# EAGLE board LilyPad_USB_Plus_Standalone-Panel-v10 (EAGLE 7.7.0), part 1 of 4
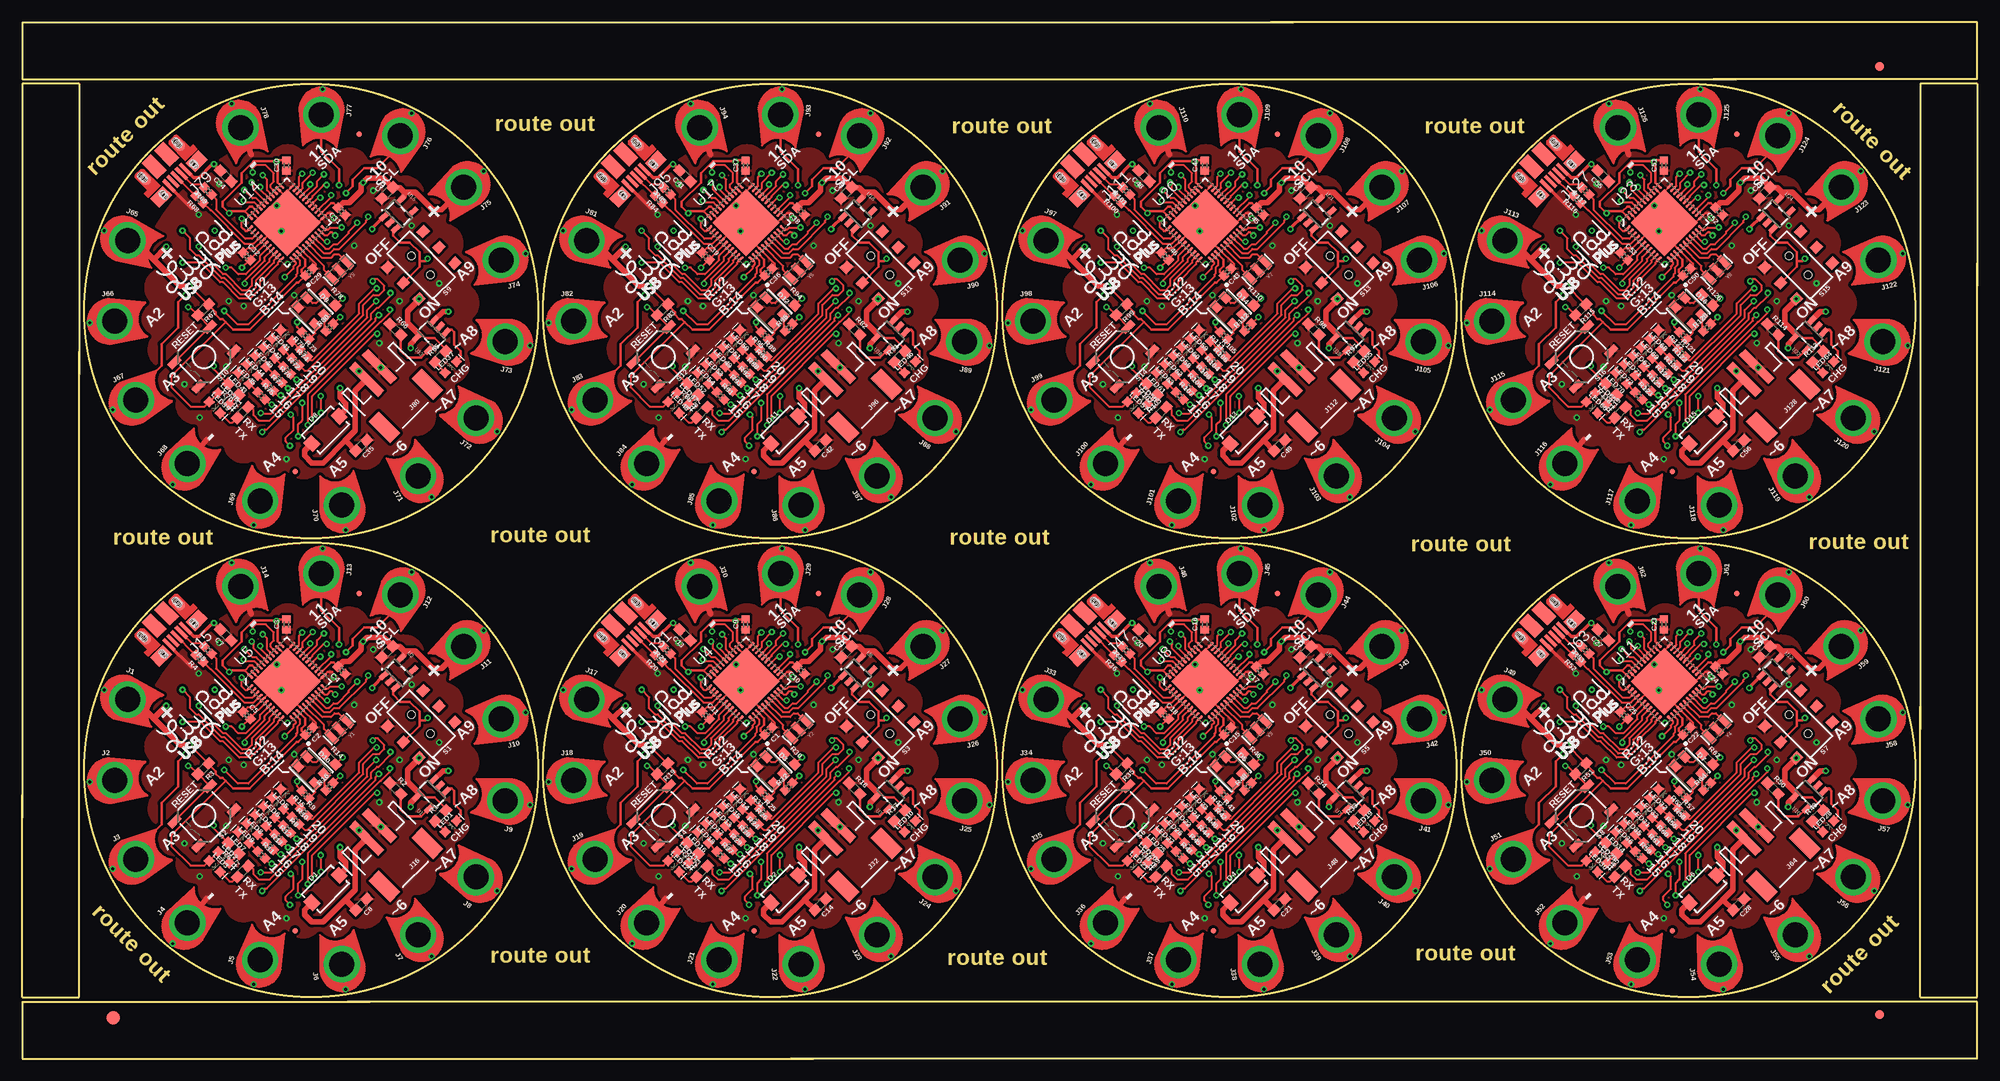
[diagram p0: board, top side]
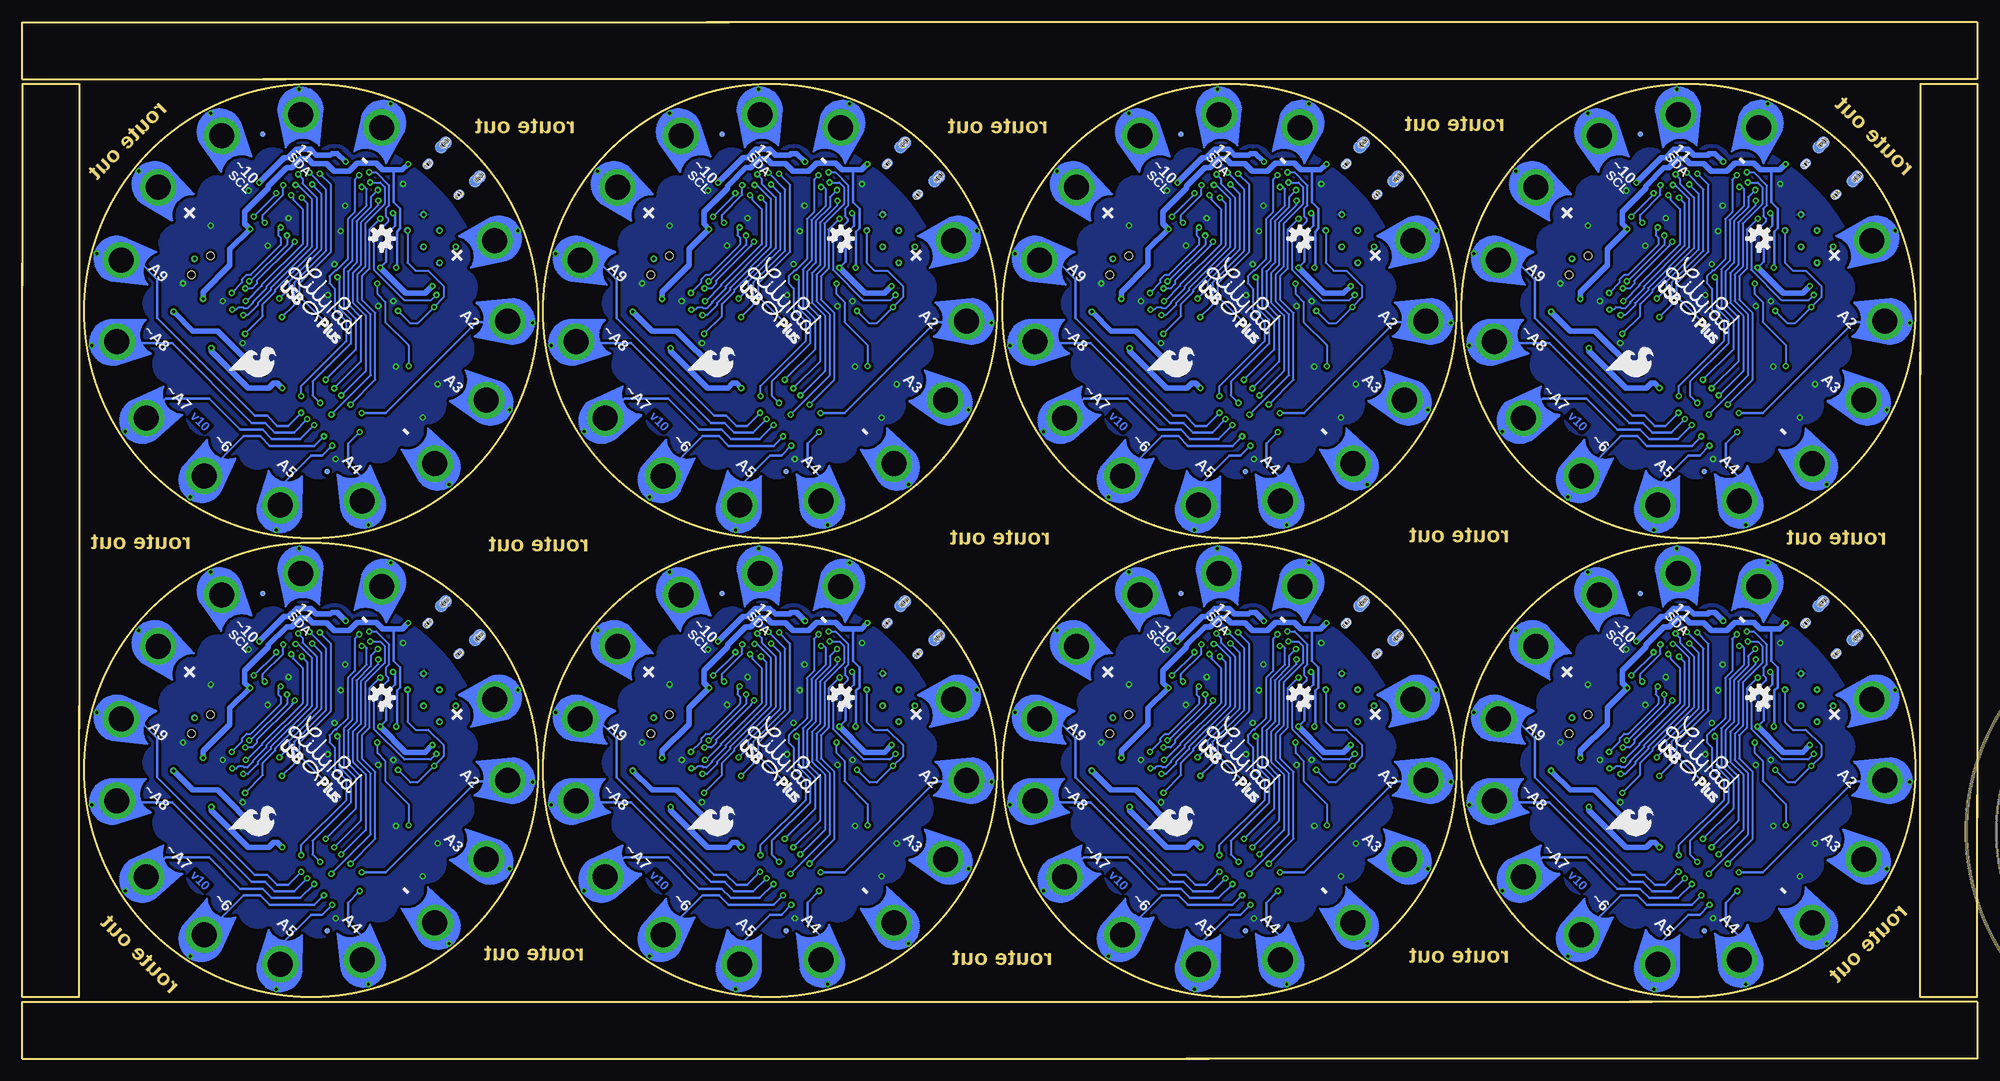
[diagram p1: board, bottom side, seen from below]

Size 218.44 x 115.82 mm. Coordinates in mm from the lower left corner, seen from the top.
Outline: 6.35,78.99 6.35,6.86 0,6.86 0,29.46
Outline: 0,26.92 0,108.97 6.35,108.97 6.35,76.45
Outline: 88.39,0 0,0 0,6.35 38.86,6.35
Outline: 36.32,6.35 218.44,6.35 218.44,0 85.85,0
Outline: 139.45,115.82 218.44,115.82 218.44,109.47 188.98,109.47
Outline: 191.52,109.47 0,109.47 0,115.82 141.99,115.82
Outline: 212.09,36.83 212.09,108.97 218.44,108.97 218.44,86.36
Outline: 218.44,88.9 218.44,6.86 212.09,6.86 212.09,39.37
Outline: circle at 32.26,32.26 radius 25.37
Outline: circle at 83.57,32.26 radius 25.37
Outline: circle at 134.87,32.26 radius 25.37
Outline: circle at 186.18,32.26 radius 25.37
Outline: circle at 32.26,83.57 radius 25.37
Outline: circle at 83.57,83.57 radius 25.37
Outline: circle at 134.87,83.57 radius 25.37
Outline: circle at 186.18,83.57 radius 25.37
Copper layers (1*16): Top 0.035mm / dielectric 1.5mm / Bottom 0.035mm
Design rules "SparkFun-2-layer-TIGHT *": minimum track width 7mil, minimum drill 15mil, track to track 8mil, track to pad 8mil, pad to pad 8mil, via to via 8mil, smd to smd 8mil, copper to edge 7mil, drill to drill 7mil, minimum pad ring 7mil, minimum via ring 7mil, stop-mask expansion 4mil, vias tented up to drill 25mil, thermal gap 10mil
tRestrict: area 10.3,41.9 to 22.6,54.3; area 61.6,41.9 to 73.9,54.3; area 112.9,41.9 to 125.2,54.3; area 164.2,41.9 to 176.5,54.3; area 10.3,93.2 to 22.6,105.6; area 61.6,93.2 to 73.9,105.6; area 112.9,93.2 to 125.2,105.6; area 164.2,93.2 to 176.5,105.6; 8 lines
bRestrict: area 10.3,41.9 to 22.6,54.3; area 61.6,41.9 to 73.9,54.3; area 112.9,41.9 to 125.2,54.3; area 164.2,41.9 to 176.5,54.3; area 10.3,93.2 to 22.6,105.6; area 61.6,93.2 to 73.9,105.6; area 112.9,93.2 to 125.2,105.6; area 164.2,93.2 to 176.5,105.6; 8 lines

## Footprints (pad centres in the part's own frame; a part is rotated, then mirrored left to right if it is on the bottom)
0402 = smd 0.85 x 0.9: 1 -0.58,0; 2 0.58,0
0603 = smd 1.1 x 1: 1 -0.85,0; 2 0.85,0
SMA-DIODE = smd 1.27 x 1.47: A -2.15,0; C 2.15,0
PLCC4SMDLED = smd 1.2 x 0.9: 1 -1.4,0.725; 2 1.4,0.725; 3 1.4,-0.725; 4 -1.4,-0.725
FIDUCIAL-1.5X3 = smd 1.5 x 1.5: 1 0,0
FIDUCIAL-1X2 = smd 1 x 1: 1 0,0
PETAL-LONG-1-2SIDE = drill 2.794 pad 4.064: 1 0.03,0
USB-MICROB-PTH = smd 0.4 x 1.75: D+ 0.031,1.331; D- -0.619,1.331; GND 1.331,1.331; ID 0.681,1.331; VBUS -1.269,1.331 | smd 1.4 x 2.1 bottom: P$1 2.701,-1.142; P$3 -2.659,-1.144 | smd 1 x 1.3: P$2 2.487,1.594; P$6 -2.368,1.604 | smd 1 x 1.3 bottom: P$4 -2.368,1.604; P$10 2.481,1.598 | smd 1.1 x 1.5: P$8 2.701,-1.142; P$12 -2.659,-1.144 | smd 2 x 1.46: SHEILD2 2.831,1.606; SHIELD -2.794,1.606 | smd 1.425 x 2.5: SHIELD3 -0.979,-1.349; SHIELD4 0.996,-1.352 | hole 0.7: -2.693,-1.134; -2.693,-1.3; -2.694,-1.499; -2.694,-1.664; 2.768,-1.134; 2.767,-1.303; 2.766,-1.496; 2.766,-1.664 | hole 0.66: -2.359,1.821; -2.349,1.691; -2.359,1.541; -2.354,1.432; 2.481,1.821; 2.491,1.691; 2.481,1.541; 2.486,1.432
JST-2-SMD = smd 1 x 4.6: 1 -1,-3.7; 2 1,-3.7 | smd 1.6 x 3.4: NC1 -3.4,1.5; NC2 3.4,1.5
MICRO-FIDUCIAL = smd 0.635 x 0.635: 1 0,0
LED-0603 = smd 1 x 1: A -0.877,0; C 0.877,0
SWITCH_DPDT_SMD_AYZ0202 = smd 1 x 1.15: 1 -2.5,2.825; 2 0,2.825; 3 2.5,2.825; 4 -2.5,-2.825; 5 0,-2.825; 6 2.5,-2.825 | hole 0.85: 1.5,0; -1.5,0
TACTILE_SWITCH_SMD_5.2MM = smd 1.524 x 0.762: 1 -2.794,1.905; 2 2.794,1.905; 3 -2.794,-1.905; 4 2.794,-1.905
PAD.03X.03 = smd 0.762 x 0.762: P$1 0,0
SOT23-5 = smd 0.55 x 1.2: 1 -0.95,-1.3; 2 0,-1.3; 3 0.95,-1.3; 4 0.95,1.3; 5 -0.95,1.3
QFN-44-PAD_1:1-LESS_PASTE = smd 0.8 x 0.3: 1 -3.337,2.458; 2 -3.337,1.958; 3 -3.337,1.479; 4 -3.337,0.979; 5 -3.337,0.5; 6 -3.337,0; 7 -3.337,-0.5; 8 -3.337,-0.979; 9 -3.337,-1.479; 10 -3.337,-1.958; 11 -3.337,-2.458; 23 3.337,-2.458; 24 3.337,-1.958; 25 3.337,-1.479; 26 3.337,-0.979; 27 3.337,-0.5; 28 3.337,0; 29 3.337,0.5; 30 3.337,0.979; 31 3.337,1.479; 32 3.337,1.958; 33 3.337,2.458 | smd 0.3 x 0.8: 12 -2.458,-3.337; 13 -1.958,-3.337; 14 -1.479,-3.337; 15 -0.979,-3.337; 16 -0.5,-3.337; 17 0,-3.337; 18 0.5,-3.337; 19 0.979,-3.337; 20 1.479,-3.337; 21 1.958,-3.337; 22 2.458,-3.337; 34 2.458,3.337; 35 1.958,3.337; 36 1.479,3.337; 37 0.979,3.337; 38 0.5,3.337; 39 0,3.337; 40 -0.5,3.337; 41 -0.979,3.337; 42 -1.479,3.337; 43 -1.958,3.337; 44 -2.458,3.337 | smd 5.3 x 5.3: EPAD 0,0
RESONATOR-SMD = smd 0.7 x 1.7: 1 -1.2,0; 2 0,0; 3 1.2,0

## Placement (x,y rotation side)
C1  0.1uF  [0402]  83.35,36.6 225 top
C2  0.1uF  [0402]  32.04,36.6 225 top
C3  0.1uF  [0402]  29.51,48.52 90 top
C4  0.1uF  [0402]  35.67,43.39 135 top
C5  1.0uF  [0402]  25.07,38.36 315 top
C6  4.7uF  [0603]  40.79,45.46 45 top
C7  4.7uF  [0603]  22.74,47.34 135 top
C8  4.7uF  [0603]  37.87,17.22 225 top
C9  0.1uF  [0402]  80.82,48.52 90 top
C10  0.1uF  [0402]  86.98,43.39 135 top
C11  1.0uF  [0402]  76.38,38.36 315 top
C12  4.7uF  [0603]  92.1,45.46 45 top
C13  4.7uF  [0603]  74.05,47.34 135 top
C14  4.7uF  [0603]  89.18,17.22 225 top
C15  0.1uF  [0402]  134.66,36.6 225 top
C16  0.1uF  [0402]  132.12,48.52 90 top
C17  0.1uF  [0402]  138.29,43.39 135 top
C18  1.0uF  [0402]  127.69,38.36 315 top
C19  4.7uF  [0603]  143.41,45.46 45 top
C20  4.7uF  [0603]  125.35,47.34 135 top
C21  4.7uF  [0603]  140.49,17.22 225 top
C22  0.1uF  [0402]  185.97,36.6 225 top
C23  0.1uF  [0402]  183.43,48.52 90 top
C24  0.1uF  [0402]  189.59,43.39 135 top
C25  1.0uF  [0402]  179,38.36 315 top
C26  4.7uF  [0603]  194.71,45.46 45 top
C27  4.7uF  [0603]  176.66,47.34 135 top
C28  4.7uF  [0603]  191.79,17.22 225 top
C29  0.1uF  [0402]  32.04,87.91 225 top
C30  0.1uF  [0402]  29.51,99.83 90 top
C31  0.1uF  [0402]  35.67,94.7 135 top
C32  1.0uF  [0402]  25.07,89.67 315 top
C33  4.7uF  [0603]  40.79,96.77 45 top
C34  4.7uF  [0603]  22.74,98.65 135 top
C35  4.7uF  [0603]  37.87,68.52 225 top
C36  0.1uF  [0402]  83.35,87.91 225 top
C37  0.1uF  [0402]  80.82,99.83 90 top
C38  0.1uF  [0402]  86.98,94.7 135 top
C39  1.0uF  [0402]  76.38,89.67 315 top
C40  4.7uF  [0603]  92.1,96.77 45 top
C41  4.7uF  [0603]  74.05,98.65 135 top
C42  4.7uF  [0603]  89.18,68.52 225 top
C43  0.1uF  [0402]  134.66,87.91 225 top
C44  0.1uF  [0402]  132.12,99.83 90 top
C45  0.1uF  [0402]  138.29,94.7 135 top
C46  1.0uF  [0402]  127.69,89.67 315 top
C47  4.7uF  [0603]  143.41,96.77 45 top
C48  4.7uF  [0603]  125.35,98.65 135 top
C49  4.7uF  [0603]  140.49,68.52 225 top
C50  0.1uF  [0402]  185.97,87.91 225 top
C51  0.1uF  [0402]  183.43,99.83 90 top
C52  0.1uF  [0402]  189.59,94.7 135 top
C53  1.0uF  [0402]  179,89.67 315 top
C54  4.7uF  [0603]  194.71,96.77 45 top
C55  4.7uF  [0603]  176.66,98.65 135 top
C56  4.7uF  [0603]  191.79,68.52 225 top
D1  3A/40V/500mV  [SMA-DIODE]  33.87,18.97 45 top
D2  3A/40V/500mV  [SMA-DIODE]  85.18,18.97 45 top
D3  XZM2CRKM2DGFBB45SCCB  [PLCC4SMDLED]  83.57,32.26 315 top
D4  3A/40V/500mV  [SMA-DIODE]  136.49,18.97 45 top
D5  XZM2CRKM2DGFBB45SCCB  [PLCC4SMDLED]  134.87,32.26 315 top
D6  3A/40V/500mV  [SMA-DIODE]  187.8,18.97 45 top
D7  XZM2CRKM2DGFBB45SCCB  [PLCC4SMDLED]  186.18,32.26 315 top
D8  3A/40V/500mV  [SMA-DIODE]  33.87,70.28 45 top
D9  XZM2CRKM2DGFBB45SCCB  [PLCC4SMDLED]  32.26,83.57 315 top
D10  XZM2CRKM2DGFBB45SCCB  [PLCC4SMDLED]  32.26,32.26 315 top
D11  3A/40V/500mV  [SMA-DIODE]  85.18,70.28 45 top
D12  XZM2CRKM2DGFBB45SCCB  [PLCC4SMDLED]  83.57,83.57 315 top
D13  3A/40V/500mV  [SMA-DIODE]  136.49,70.28 45 top
D14  XZM2CRKM2DGFBB45SCCB  [PLCC4SMDLED]  134.87,83.57 315 top
D15  3A/40V/500mV  [SMA-DIODE]  187.8,70.28 45 top
D16  XZM2CRKM2DGFBB45SCCB  [PLCC4SMDLED]  186.18,83.57 315 top
E$1  [FIDUCIAL-1.5X3]  10.16,4.57 0 top
E$5  [FIDUCIAL-1X2]  207.52,110.87 90 top
E$8  [FIDUCIAL-1X2]  207.52,4.95 90 top
J1  SEWTAP_LONG-2SIDE  [PETAL-LONG-1-2SIDE]  11.72,40.14 339 top
J2  SEWTAP_LONG-2SIDE  [PETAL-LONG-1-2SIDE]  10.29,31.11 3 top
J3  SEWTAP_LONG-2SIDE  [PETAL-LONG-1-2SIDE]  12.66,22.27 27 top
J4  SEWTAP_LONG-2SIDE  [PETAL-LONG-1-2SIDE]  18.41,15.16 51 top
J5  SEWTAP_LONG-2SIDE  [PETAL-LONG-1-2SIDE]  26.56,11.01 75 top
J6  SEWTAP_LONG-2SIDE  [PETAL-LONG-1-2SIDE]  35.7,10.53 99 top
J7  SEWTAP_LONG-2SIDE  [PETAL-LONG-1-2SIDE]  44.24,13.81 123 top
J8  SEWTAP_LONG-2SIDE  [PETAL-LONG-1-2SIDE]  50.71,20.28 147 top
J9  SEWTAP_LONG-2SIDE  [PETAL-LONG-1-2SIDE]  53.99,28.82 171 top
J10  SEWTAP_LONG-2SIDE  [PETAL-LONG-1-2SIDE]  53.51,37.95 195 top
J11  SEWTAP_LONG-2SIDE  [PETAL-LONG-1-2SIDE]  49.35,46.1 219 top
J12  SEWTAP_LONG-2SIDE  [PETAL-LONG-1-2SIDE]  42.24,51.86 243 top
J13  SEWTAP_LONG-2SIDE  [PETAL-LONG-1-2SIDE]  33.41,54.23 267 top
J14  SEWTAP_LONG-2SIDE  [PETAL-LONG-1-2SIDE]  24.37,52.8 291 top
J15  AMP FCI 10103594-0001LF  [USB-MICROB-PTH]  16.37,48.14 225 top
J16  [JST-2-SMD]  41.8,22.72 225 top
J17  SEWTAP_LONG-2SIDE  [PETAL-LONG-1-2SIDE]  63.03,40.14 339 top
J18  SEWTAP_LONG-2SIDE  [PETAL-LONG-1-2SIDE]  61.59,31.11 3 top
J19  SEWTAP_LONG-2SIDE  [PETAL-LONG-1-2SIDE]  63.96,22.27 27 top
J20  SEWTAP_LONG-2SIDE  [PETAL-LONG-1-2SIDE]  69.72,15.16 51 top
J21  SEWTAP_LONG-2SIDE  [PETAL-LONG-1-2SIDE]  77.87,11.01 75 top
J22  SEWTAP_LONG-2SIDE  [PETAL-LONG-1-2SIDE]  87.01,10.53 99 top
J23  SEWTAP_LONG-2SIDE  [PETAL-LONG-1-2SIDE]  95.55,13.81 123 top
J24  SEWTAP_LONG-2SIDE  [PETAL-LONG-1-2SIDE]  102.02,20.28 147 top
J25  SEWTAP_LONG-2SIDE  [PETAL-LONG-1-2SIDE]  105.29,28.82 171 top
J26  SEWTAP_LONG-2SIDE  [PETAL-LONG-1-2SIDE]  104.82,37.95 195 top
J27  SEWTAP_LONG-2SIDE  [PETAL-LONG-1-2SIDE]  100.66,46.1 219 top
J28  SEWTAP_LONG-2SIDE  [PETAL-LONG-1-2SIDE]  93.55,51.86 243 top
J29  SEWTAP_LONG-2SIDE  [PETAL-LONG-1-2SIDE]  84.72,54.23 267 top
J30  SEWTAP_LONG-2SIDE  [PETAL-LONG-1-2SIDE]  75.68,52.8 291 top
J31  AMP FCI 10103594-0001LF  [USB-MICROB-PTH]  67.68,48.14 225 top
J32  [JST-2-SMD]  93.11,22.72 225 top
J33  SEWTAP_LONG-2SIDE  [PETAL-LONG-1-2SIDE]  114.33,40.14 339 top
J34  SEWTAP_LONG-2SIDE  [PETAL-LONG-1-2SIDE]  112.9,31.11 3 top
J35  SEWTAP_LONG-2SIDE  [PETAL-LONG-1-2SIDE]  115.27,22.27 27 top
J36  SEWTAP_LONG-2SIDE  [PETAL-LONG-1-2SIDE]  121.03,15.16 51 top
J37  SEWTAP_LONG-2SIDE  [PETAL-LONG-1-2SIDE]  129.18,11.01 75 top
J38  SEWTAP_LONG-2SIDE  [PETAL-LONG-1-2SIDE]  138.32,10.53 99 top
J39  SEWTAP_LONG-2SIDE  [PETAL-LONG-1-2SIDE]  146.86,13.81 123 top
J40  SEWTAP_LONG-2SIDE  [PETAL-LONG-1-2SIDE]  153.32,20.28 147 top
J41  SEWTAP_LONG-2SIDE  [PETAL-LONG-1-2SIDE]  156.6,28.82 171 top
J42  SEWTAP_LONG-2SIDE  [PETAL-LONG-1-2SIDE]  156.12,37.95 195 top
J43  SEWTAP_LONG-2SIDE  [PETAL-LONG-1-2SIDE]  151.97,46.1 219 top
J44  SEWTAP_LONG-2SIDE  [PETAL-LONG-1-2SIDE]  144.86,51.86 243 top
J45  SEWTAP_LONG-2SIDE  [PETAL-LONG-1-2SIDE]  136.03,54.23 267 top
J46  SEWTAP_LONG-2SIDE  [PETAL-LONG-1-2SIDE]  126.99,52.8 291 top
J47  AMP FCI 10103594-0001LF  [USB-MICROB-PTH]  118.99,48.14 225 top
J48  [JST-2-SMD]  144.42,22.72 225 top
J49  SEWTAP_LONG-2SIDE  [PETAL-LONG-1-2SIDE]  165.64,40.14 339 top
J50  SEWTAP_LONG-2SIDE  [PETAL-LONG-1-2SIDE]  164.21,31.11 3 top
J51  SEWTAP_LONG-2SIDE  [PETAL-LONG-1-2SIDE]  166.58,22.27 27 top
J52  SEWTAP_LONG-2SIDE  [PETAL-LONG-1-2SIDE]  172.34,15.16 51 top
J53  SEWTAP_LONG-2SIDE  [PETAL-LONG-1-2SIDE]  180.49,11.01 75 top
J54  SEWTAP_LONG-2SIDE  [PETAL-LONG-1-2SIDE]  189.62,10.53 99 top
J55  SEWTAP_LONG-2SIDE  [PETAL-LONG-1-2SIDE]  198.16,13.81 123 top
J56  SEWTAP_LONG-2SIDE  [PETAL-LONG-1-2SIDE]  204.63,20.28 147 top
J57  SEWTAP_LONG-2SIDE  [PETAL-LONG-1-2SIDE]  207.91,28.82 171 top
J58  SEWTAP_LONG-2SIDE  [PETAL-LONG-1-2SIDE]  207.43,37.95 195 top
J59  SEWTAP_LONG-2SIDE  [PETAL-LONG-1-2SIDE]  203.28,46.1 219 top
J60  SEWTAP_LONG-2SIDE  [PETAL-LONG-1-2SIDE]  196.17,51.86 243 top
J61  SEWTAP_LONG-2SIDE  [PETAL-LONG-1-2SIDE]  187.33,54.23 267 top
J62  SEWTAP_LONG-2SIDE  [PETAL-LONG-1-2SIDE]  178.3,52.8 291 top
J63  AMP FCI 10103594-0001LF  [USB-MICROB-PTH]  170.3,48.14 225 top
J64  [JST-2-SMD]  195.72,22.72 225 top
J65  SEWTAP_LONG-2SIDE  [PETAL-LONG-1-2SIDE]  11.72,91.45 339 top
J66  SEWTAP_LONG-2SIDE  [PETAL-LONG-1-2SIDE]  10.29,82.41 3 top
J67  SEWTAP_LONG-2SIDE  [PETAL-LONG-1-2SIDE]  12.66,73.58 27 top
J68  SEWTAP_LONG-2SIDE  [PETAL-LONG-1-2SIDE]  18.41,66.47 51 top
J69  SEWTAP_LONG-2SIDE  [PETAL-LONG-1-2SIDE]  26.56,62.32 75 top
J70  SEWTAP_LONG-2SIDE  [PETAL-LONG-1-2SIDE]  35.7,61.84 99 top
J71  SEWTAP_LONG-2SIDE  [PETAL-LONG-1-2SIDE]  44.24,65.12 123 top
J72  SEWTAP_LONG-2SIDE  [PETAL-LONG-1-2SIDE]  50.71,71.58 147 top
J73  SEWTAP_LONG-2SIDE  [PETAL-LONG-1-2SIDE]  53.99,80.12 171 top
J74  SEWTAP_LONG-2SIDE  [PETAL-LONG-1-2SIDE]  53.51,89.26 195 top
J75  SEWTAP_LONG-2SIDE  [PETAL-LONG-1-2SIDE]  49.35,97.41 219 top
J76  SEWTAP_LONG-2SIDE  [PETAL-LONG-1-2SIDE]  42.24,103.17 243 top
J77  SEWTAP_LONG-2SIDE  [PETAL-LONG-1-2SIDE]  33.41,105.54 267 top
J78  SEWTAP_LONG-2SIDE  [PETAL-LONG-1-2SIDE]  24.37,104.11 291 top
J79  AMP FCI 10103594-0001LF  [USB-MICROB-PTH]  16.37,99.45 225 top
J80  [JST-2-SMD]  41.8,74.02 225 top
J81  SEWTAP_LONG-2SIDE  [PETAL-LONG-1-2SIDE]  63.03,91.45 339 top
J82  SEWTAP_LONG-2SIDE  [PETAL-LONG-1-2SIDE]  61.59,82.41 3 top
J83  SEWTAP_LONG-2SIDE  [PETAL-LONG-1-2SIDE]  63.96,73.58 27 top
J84  SEWTAP_LONG-2SIDE  [PETAL-LONG-1-2SIDE]  69.72,66.47 51 top
J85  SEWTAP_LONG-2SIDE  [PETAL-LONG-1-2SIDE]  77.87,62.32 75 top
J86  SEWTAP_LONG-2SIDE  [PETAL-LONG-1-2SIDE]  87.01,61.84 99 top
J87  SEWTAP_LONG-2SIDE  [PETAL-LONG-1-2SIDE]  95.55,65.12 123 top
J88  SEWTAP_LONG-2SIDE  [PETAL-LONG-1-2SIDE]  102.02,71.58 147 top
J89  SEWTAP_LONG-2SIDE  [PETAL-LONG-1-2SIDE]  105.29,80.12 171 top
J90  SEWTAP_LONG-2SIDE  [PETAL-LONG-1-2SIDE]  104.82,89.26 195 top
J91  SEWTAP_LONG-2SIDE  [PETAL-LONG-1-2SIDE]  100.66,97.41 219 top
J92  SEWTAP_LONG-2SIDE  [PETAL-LONG-1-2SIDE]  93.55,103.17 243 top
J93  SEWTAP_LONG-2SIDE  [PETAL-LONG-1-2SIDE]  84.72,105.54 267 top
J94  SEWTAP_LONG-2SIDE  [PETAL-LONG-1-2SIDE]  75.68,104.11 291 top
J95  AMP FCI 10103594-0001LF  [USB-MICROB-PTH]  67.68,99.45 225 top
J96  [JST-2-SMD]  93.11,74.02 225 top
J97  SEWTAP_LONG-2SIDE  [PETAL-LONG-1-2SIDE]  114.33,91.45 339 top
J98  SEWTAP_LONG-2SIDE  [PETAL-LONG-1-2SIDE]  112.9,82.41 3 top
J99  SEWTAP_LONG-2SIDE  [PETAL-LONG-1-2SIDE]  115.27,73.58 27 top
J100  SEWTAP_LONG-2SIDE  [PETAL-LONG-1-2SIDE]  121.03,66.47 51 top
J101  SEWTAP_LONG-2SIDE  [PETAL-LONG-1-2SIDE]  129.18,62.32 75 top
J102  SEWTAP_LONG-2SIDE  [PETAL-LONG-1-2SIDE]  138.32,61.84 99 top
J103  SEWTAP_LONG-2SIDE  [PETAL-LONG-1-2SIDE]  146.86,65.12 123 top
J104  SEWTAP_LONG-2SIDE  [PETAL-LONG-1-2SIDE]  153.32,71.58 147 top
J105  SEWTAP_LONG-2SIDE  [PETAL-LONG-1-2SIDE]  156.6,80.12 171 top
J106  SEWTAP_LONG-2SIDE  [PETAL-LONG-1-2SIDE]  156.12,89.26 195 top
J107  SEWTAP_LONG-2SIDE  [PETAL-LONG-1-2SIDE]  151.97,97.41 219 top
J108  SEWTAP_LONG-2SIDE  [PETAL-LONG-1-2SIDE]  144.86,103.17 243 top
J109  SEWTAP_LONG-2SIDE  [PETAL-LONG-1-2SIDE]  136.03,105.54 267 top
J110  SEWTAP_LONG-2SIDE  [PETAL-LONG-1-2SIDE]  126.99,104.11 291 top
J111  AMP FCI 10103594-0001LF  [USB-MICROB-PTH]  118.99,99.45 225 top
J112  [JST-2-SMD]  144.42,74.02 225 top
J113  SEWTAP_LONG-2SIDE  [PETAL-LONG-1-2SIDE]  165.64,91.45 339 top
J114  SEWTAP_LONG-2SIDE  [PETAL-LONG-1-2SIDE]  164.21,82.41 3 top
J115  SEWTAP_LONG-2SIDE  [PETAL-LONG-1-2SIDE]  166.58,73.58 27 top
J116  SEWTAP_LONG-2SIDE  [PETAL-LONG-1-2SIDE]  172.34,66.47 51 top
J117  SEWTAP_LONG-2SIDE  [PETAL-LONG-1-2SIDE]  180.49,62.32 75 top
J118  SEWTAP_LONG-2SIDE  [PETAL-LONG-1-2SIDE]  189.62,61.84 99 top
J119  SEWTAP_LONG-2SIDE  [PETAL-LONG-1-2SIDE]  198.16,65.12 123 top
J120  SEWTAP_LONG-2SIDE  [PETAL-LONG-1-2SIDE]  204.63,71.58 147 top
J121  SEWTAP_LONG-2SIDE  [PETAL-LONG-1-2SIDE]  207.91,80.12 171 top
J122  SEWTAP_LONG-2SIDE  [PETAL-LONG-1-2SIDE]  207.43,89.26 195 top
J123  SEWTAP_LONG-2SIDE  [PETAL-LONG-1-2SIDE]  203.28,97.41 219 top
J124  SEWTAP_LONG-2SIDE  [PETAL-LONG-1-2SIDE]  196.17,103.17 243 top
J125  SEWTAP_LONG-2SIDE  [PETAL-LONG-1-2SIDE]  187.33,105.54 267 top
J126  SEWTAP_LONG-2SIDE  [PETAL-LONG-1-2SIDE]  178.3,104.11 291 top
J127  AMP FCI 10103594-0001LF  [USB-MICROB-PTH]  170.3,99.45 225 top
J128  [JST-2-SMD]  195.72,74.02 225 top
JP1  FIDUCIALUFIDUCIAL  [MICRO-FIDUCIAL]  30.46,14.3 315 bottom
JP2  FIDUCIALUFIDUCIAL  [MICRO-FIDUCIAL]  30.46,14.3 45 top
JP3  FIDUCIALUFIDUCIAL  [MICRO-FIDUCIAL]  37.65,52.02 45 top
JP4  FIDUCIALUFIDUCIAL  [MICRO-FIDUCIAL]  37.65,52.01 315 bottom
JP5  FIDUCIALUFIDUCIAL  [MICRO-FIDUCIAL]  81.77,14.3 45 top
JP6  FIDUCIALUFIDUCIAL  [MICRO-FIDUCIAL]  88.95,52.02 45 top
JP7  FIDUCIALUFIDUCIAL  [MICRO-FIDUCIAL]  81.77,14.3 315 bottom
JP8  FIDUCIALUFIDUCIAL  [MICRO-FIDUCIAL]  88.95,52.01 315 bottom
JP9  FIDUCIALUFIDUCIAL  [MICRO-FIDUCIAL]  133.08,14.3 45 top
JP10  FIDUCIALUFIDUCIAL  [MICRO-FIDUCIAL]  140.26,52.02 45 top
JP11  FIDUCIALUFIDUCIAL  [MICRO-FIDUCIAL]  133.08,14.3 315 bottom
JP12  FIDUCIALUFIDUCIAL  [MICRO-FIDUCIAL]  140.26,52.01 315 bottom
JP13  FIDUCIALUFIDUCIAL  [MICRO-FIDUCIAL]  184.39,14.3 45 top
JP14  FIDUCIALUFIDUCIAL  [MICRO-FIDUCIAL]  191.57,52.02 45 top
JP15  FIDUCIALUFIDUCIAL  [MICRO-FIDUCIAL]  184.39,14.3 315 bottom
JP16  FIDUCIALUFIDUCIAL  [MICRO-FIDUCIAL]  191.57,52.01 315 bottom
JP17  FIDUCIALUFIDUCIAL  [MICRO-FIDUCIAL]  30.46,65.61 45 top
JP18  FIDUCIALUFIDUCIAL  [MICRO-FIDUCIAL]  37.65,103.32 45 top
JP19  FIDUCIALUFIDUCIAL  [MICRO-FIDUCIAL]  30.46,65.61 315 bottom
JP20  FIDUCIALUFIDUCIAL  [MICRO-FIDUCIAL]  37.65,103.32 315 bottom
JP21  FIDUCIALUFIDUCIAL  [MICRO-FIDUCIAL]  81.77,65.61 45 top
JP22  FIDUCIALUFIDUCIAL  [MICRO-FIDUCIAL]  88.95,103.32 45 top
JP23  FIDUCIALUFIDUCIAL  [MICRO-FIDUCIAL]  81.77,65.61 315 bottom
JP24  FIDUCIALUFIDUCIAL  [MICRO-FIDUCIAL]  88.95,103.32 315 bottom
JP25  FIDUCIALUFIDUCIAL  [MICRO-FIDUCIAL]  133.08,65.61 45 top
JP26  FIDUCIALUFIDUCIAL  [MICRO-FIDUCIAL]  140.26,103.32 45 top
JP27  FIDUCIALUFIDUCIAL  [MICRO-FIDUCIAL]  133.08,65.61 315 bottom
JP28  FIDUCIALUFIDUCIAL  [MICRO-FIDUCIAL]  140.26,103.32 315 bottom
JP29  FIDUCIALUFIDUCIAL  [MICRO-FIDUCIAL]  184.39,65.61 45 top
JP30  FIDUCIALUFIDUCIAL  [MICRO-FIDUCIAL]  191.57,103.32 45 top
JP31  FIDUCIALUFIDUCIAL  [MICRO-FIDUCIAL]  184.39,65.61 315 bottom
JP32  FIDUCIALUFIDUCIAL  [MICRO-FIDUCIAL]  191.57,103.32 315 bottom
LED1  RED  [LED-0603]  47.88,25.97 45 top
LED2  Yellow  [LED-0603]  22.49,22.49 315 top
LED3  GREEN  [LED-0603]  21.48,21.48 315 top
LED4  WHITE  [LED-0603]  27.6,27.6 135 top
LED5  WHITE  [LED-0603]  29.51,29.51 135 top
LED6  WHITE  [LED-0603]  28.55,28.55 135 top
LED7  WHITE  [LED-0603]  24.74,24.74 135 top
LED8  WHITE  [LED-0603]  26.65,26.65 135 top
LED9  WHITE  [LED-0603]  25.69,25.69 135 top
LED10  RED  [LED-0603]  99.19,25.97 45 top
LED11  Yellow  [LED-0603]  73.8,22.49 315 top
LED12  GREEN  [LED-0603]  72.79,21.48 315 top
LED13  WHITE  [LED-0603]  78.91,27.6 135 top
LED14  WHITE  [LED-0603]  80.82,29.51 135 top
LED15  WHITE  [LED-0603]  79.86,28.55 135 top
LED16  WHITE  [LED-0603]  76.05,24.74 135 top
LED17  WHITE  [LED-0603]  77.95,26.65 135 top
LED18  WHITE  [LED-0603]  77,25.69 135 top
LED19  RED  [LED-0603]  150.5,25.97 45 top
LED20  Yellow  [LED-0603]  125.11,22.49 315 top
LED21  GREEN  [LED-0603]  124.1,21.48 315 top
LED22  WHITE  [LED-0603]  130.22,27.6 135 top
LED23  WHITE  [LED-0603]  132.12,29.51 135 top
LED24  WHITE  [LED-0603]  131.17,28.55 135 top
LED25  WHITE  [LED-0603]  127.35,24.74 135 top
LED26  WHITE  [LED-0603]  129.26,26.65 135 top
LED27  WHITE  [LED-0603]  128.31,25.69 135 top
LED28  RED  [LED-0603]  201.81,25.97 45 top
LED29  Yellow  [LED-0603]  176.42,22.49 315 top
LED30  GREEN  [LED-0603]  175.41,21.48 315 top
LED31  WHITE  [LED-0603]  181.52,27.6 135 top
LED32  WHITE  [LED-0603]  183.43,29.51 135 top
LED33  WHITE  [LED-0603]  182.48,28.55 135 top
LED34  WHITE  [LED-0603]  178.66,24.74 135 top
LED35  WHITE  [LED-0603]  180.57,26.65 135 top
LED36  WHITE  [LED-0603]  179.62,25.69 135 top
LED37  RED  [LED-0603]  47.88,77.28 45 top
LED38  Yellow  [LED-0603]  22.49,73.8 315 top
LED39  GREEN  [LED-0603]  21.48,72.79 315 top
LED40  WHITE  [LED-0603]  27.6,78.91 135 top
LED41  WHITE  [LED-0603]  29.51,80.82 135 top
LED42  WHITE  [LED-0603]  28.55,79.86 135 top
LED43  WHITE  [LED-0603]  24.74,76.05 135 top
LED44  WHITE  [LED-0603]  26.65,77.95 135 top
LED45  WHITE  [LED-0603]  25.69,77 135 top
LED46  RED  [LED-0603]  99.19,77.28 45 top
LED47  Yellow  [LED-0603]  73.8,73.8 315 top
LED48  GREEN  [LED-0603]  72.79,72.79 315 top
LED49  WHITE  [LED-0603]  78.91,78.91 135 top
LED50  WHITE  [LED-0603]  80.82,80.82 135 top
LED51  WHITE  [LED-0603]  79.86,79.86 135 top
LED52  WHITE  [LED-0603]  76.05,76.05 135 top
LED53  WHITE  [LED-0603]  77.95,77.95 135 top
LED54  WHITE  [LED-0603]  77,77 135 top
LED55  RED  [LED-0603]  150.5,77.28 45 top
LED56  Yellow  [LED-0603]  125.11,73.8 315 top
LED57  GREEN  [LED-0603]  124.1,72.79 315 top
LED58  WHITE  [LED-0603]  130.22,78.91 135 top
LED59  WHITE  [LED-0603]  132.12,80.82 135 top
LED60  WHITE  [LED-0603]  131.17,79.86 135 top
LED61  WHITE  [LED-0603]  127.35,76.05 135 top
LED62  WHITE  [LED-0603]  129.26,77.95 135 top
LED63  WHITE  [LED-0603]  128.31,77 135 top
LED64  RED  [LED-0603]  201.81,77.28 45 top
LED65  Yellow  [LED-0603]  176.42,73.8 315 top
LED66  GREEN  [LED-0603]  175.41,72.79 315 top
LED67  WHITE  [LED-0603]  181.52,78.91 135 top
LED68  WHITE  [LED-0603]  183.43,80.82 135 top
LED69  WHITE  [LED-0603]  182.48,79.86 135 top
LED70  WHITE  [LED-0603]  178.66,76.05 135 top
LED71  WHITE  [LED-0603]  180.57,77.95 135 top
LED72  WHITE  [LED-0603]  179.62,77 135 top
LOGO1  SFE_LOGO_FLAME.2_INCH  [SFE_LOGO_FLAME_.2]  41.87,25.7 315 bottom
LOGO2  OSHW-LOGOS  [OSHW-LOGO-S]  75.66,40.34 315 bottom
LOGO3  SFE_LOGO_FLAME.2_INCH  [SFE_LOGO_FLAME_.2]  93.17,25.7 315 bottom
LOGO4  OSHW-LOGOS  [OSHW-LOGO-S]  126.97,40.34 315 bottom
LOGO5  SFE_LOGO_FLAME.2_INCH  [SFE_LOGO_FLAME_.2]  144.48,25.7 315 bottom
LOGO6  OSHW-LOGOS  [OSHW-LOGO-S]  24.36,40.34 315 bottom
LOGO7  OSHW-LOGOS  [OSHW-LOGO-S]  178.28,40.34 315 bottom
LOGO8  SFE_LOGO_FLAME.2_INCH  [SFE_LOGO_FLAME_.2]  195.79,25.7 315 bottom
LOGO9  OSHW-LOGOS  [OSHW-LOGO-S]  24.36,91.65 315 bottom
LOGO10  SFE_LOGO_FLAME.2_INCH  [SFE_LOGO_FLAME_.2]  41.87,77.01 315 bottom
LOGO11  OSHW-LOGOS  [OSHW-LOGO-S]  75.66,91.65 315 bottom
LOGO12  SFE_LOGO_FLAME.2_INCH  [SFE_LOGO_FLAME_.2]  93.17,77.01 315 bottom
LOGO13  OSHW-LOGOS  [OSHW-LOGO-S]  126.97,91.65 315 bottom
LOGO14  SFE_LOGO_FLAME.2_INCH  [SFE_LOGO_FLAME_.2]  144.48,77.01 315 bottom
LOGO15  OSHW-LOGOS  [OSHW-LOGO-S]  178.28,91.65 315 bottom
LOGO16  SFE_LOGO_FLAME.2_INCH  [SFE_LOGO_FLAME_.2]  195.79,77.01 315 bottom
R1  330  [0603]  46.72,27.14 45 top
R2  10k  [0603]  41.69,30.19 315 top
R3  10k  [0603]  20.22,32.4 225 top
R4  22  [0402]  19.81,44.73 135 top
R5  22  [0402]  20.74,45.66 135 top
R6  2.2k  [0603]  23.61,23.5 135 top
R7  330  [0603]  24.62,20.92 45 top
R8  470  [0402]  29.56,25.64 315 top
R9  470  [0402]  31.47,27.54 315 top
R10  470  [0402]  30.52,26.59 315 top
R11  470  [0402]  26.7,22.77 315 top
R12  470  [0402]  28.61,24.68 315 top
R13  470  [0402]  27.66,23.73 315 top
R14  330  [0603]  34.39,33.49 315 top
R15  22  [0402]  31.64,29.51 135 top
R16  22  [0402]  34.33,30.41 45 top
R17  330  [0603]  98.02,27.14 45 top
R18  10k  [0603]  93,30.19 315 top
R19  10k  [0603]  71.53,32.4 225 top
R20  22  [0402]  71.12,44.73 135 top
R21  22  [0402]  72.05,45.66 135 top
R22  2.2k  [0603]  74.92,23.5 135 top
R23  330  [0603]  75.93,20.92 45 top
R24  470  [0402]  80.87,25.64 315 top
R25  470  [0402]  82.78,27.54 315 top
R26  470  [0402]  81.83,26.59 315 top
R27  470  [0402]  78.01,22.77 315 top
R28  470  [0402]  79.92,24.68 315 top
R29  470  [0402]  78.96,23.73 315 top
R30  330  [0603]  85.7,33.49 315 top
R31  22  [0402]  82.95,29.51 135 top
R32  22  [0402]  85.64,30.41 45 top
R33  330  [0603]  149.33,27.14 45 top
R34  10k  [0603]  144.3,30.19 315 top
R35  10k  [0603]  122.84,32.4 225 top
R36  22  [0402]  122.43,44.73 135 top
R37  22  [0402]  123.36,45.66 135 top
R38  2.2k  [0603]  126.23,23.5 135 top
R39  330  [0603]  127.24,20.92 45 top
R40  470  [0402]  132.18,25.64 315 top
R41  470  [0402]  134.09,27.54 315 top
R42  470  [0402]  133.13,26.59 315 top
R43  470  [0402]  129.32,22.77 315 top
R44  470  [0402]  131.23,24.68 315 top
R45  470  [0402]  130.27,23.73 315 top
R46  330  [0603]  137.01,33.49 315 top
R47  22  [0402]  134.26,29.51 135 top
R48  22  [0402]  136.95,30.41 45 top
R49  330  [0603]  200.64,27.14 45 top
R50  10k  [0603]  195.61,30.19 315 top
R51  10k  [0603]  174.15,32.4 225 top
R52  22  [0402]  173.73,44.73 135 top
R53  22  [0402]  174.66,45.66 135 top
R54  2.2k  [0603]  177.54,23.5 135 top
R55  330  [0603]  178.55,20.92 45 top
R56  470  [0402]  183.49,25.64 315 top
R57  470  [0402]  185.4,27.54 315 top
R58  470  [0402]  184.44,26.59 315 top
R59  470  [0402]  180.63,22.77 315 top
R60  470  [0402]  182.53,24.68 315 top
R61  470  [0402]  181.58,23.73 315 top
R62  330  [0603]  188.31,33.49 315 top
R63  22  [0402]  185.56,29.51 135 top
R64  22  [0402]  188.26,30.41 45 top
R65  330  [0603]  46.72,78.45 45 top
R66  10k  [0603]  41.69,81.5 315 top
R67  10k  [0603]  20.22,83.71 225 top
R68  22  [0402]  19.81,96.04 135 top
R69  22  [0402]  20.74,96.97 135 top
R70  2.2k  [0603]  23.61,74.81 135 top
R71  330  [0603]  24.62,72.23 45 top
R72  470  [0402]  29.56,76.94 315 top
R73  470  [0402]  31.47,78.85 315 top
R74  470  [0402]  30.52,77.9 315 top
R75  470  [0402]  26.7,74.08 315 top
R76  470  [0402]  28.61,75.99 315 top
R77  470  [0402]  27.66,75.03 315 top
R78  330  [0603]  34.39,84.8 315 top
R79  22  [0402]  31.64,80.82 135 top
R80  22  [0402]  34.33,81.71 45 top
R81  330  [0603]  98.02,78.45 45 top
R82  10k  [0603]  93,81.5 315 top
R83  10k  [0603]  71.53,83.71 225 top
R84  22  [0402]  71.12,96.04 135 top
R85  22  [0402]  72.05,96.97 135 top
R86  2.2k  [0603]  74.92,74.81 135 top
R87  330  [0603]  75.93,72.23 45 top
R88  470  [0402]  80.87,76.94 315 top
R89  470  [0402]  82.78,78.85 315 top
R90  470  [0402]  81.83,77.9 315 top
R91  470  [0402]  78.01,74.08 315 top
R92  470  [0402]  79.92,75.99 315 top
R93  470  [0402]  78.96,75.03 315 top
R94  330  [0603]  85.7,84.8 315 top
R95  22  [0402]  82.95,80.82 135 top
R96  22  [0402]  85.64,81.71 45 top
R97  330  [0603]  149.33,78.45 45 top
R98  10k  [0603]  144.3,81.5 315 top
R99  10k  [0603]  122.84,83.71 225 top
R100  22  [0402]  122.43,96.04 135 top
R101  22  [0402]  123.36,96.97 135 top
R102  2.2k  [0603]  126.23,74.81 135 top
R103  330  [0603]  127.24,72.23 45 top
R104  470  [0402]  132.18,76.94 315 top
R105  470  [0402]  134.09,78.85 315 top
R106  470  [0402]  133.13,77.9 315 top
R107  470  [0402]  129.32,74.08 315 top
R108  470  [0402]  131.23,75.99 315 top
R109  470  [0402]  130.27,75.03 315 top
R110  330  [0603]  137.01,84.8 315 top
R111  22  [0402]  134.26,80.82 135 top
R112  22  [0402]  136.95,81.71 45 top
R113  330  [0603]  200.64,78.45 45 top
R114  10k  [0603]  195.61,81.5 315 top
R115  10k  [0603]  174.15,83.71 225 top
R116  22  [0402]  173.73,96.04 135 top
R117  22  [0402]  174.66,96.97 135 top
R118  2.2k  [0603]  177.54,74.81 135 top
R119  330  [0603]  178.55,72.23 45 top
R120  470  [0402]  183.49,76.94 315 top
R121  470  [0402]  185.4,78.85 315 top
R122  470  [0402]  184.44,77.9 315 top
R123  470  [0402]  180.63,74.08 315 top
R124  470  [0402]  182.53,75.99 315 top
R125  470  [0402]  181.58,75.03 315 top
R126  330  [0603]  188.31,84.8 315 top
R127  22  [0402]  185.56,80.82 135 top
R128  22  [0402]  188.26,81.71 45 top
S1  [SWITCH_DPDT_SMD_AYZ0202]  44.56,37.38 135 top
S2  !RESET  [TACTILE_SWITCH_SMD_5.2MM]  20.31,27.14 225 top
S3  [SWITCH_DPDT_SMD_AYZ0202]  95.87,37.38 135 top
S4  !RESET  [TACTILE_SWITCH_SMD_5.2MM]  71.62,27.14 225 top
S5  [SWITCH_DPDT_SMD_AYZ0202]  147.18,37.38 135 top
S6  !RESET  [TACTILE_SWITCH_SMD_5.2MM]  122.93,27.14 225 top
S7  [SWITCH_DPDT_SMD_AYZ0202]  198.48,37.38 135 top
S8  !RESET  [TACTILE_SWITCH_SMD_5.2MM]  174.24,27.14 225 top
S9  [SWITCH_DPDT_SMD_AYZ0202]  44.56,88.68 135 top
S10  !RESET  [TACTILE_SWITCH_SMD_5.2MM]  20.31,78.45 225 top
S11  [SWITCH_DPDT_SMD_AYZ0202]  95.87,88.68 135 top
S12  !RESET  [TACTILE_SWITCH_SMD_5.2MM]  71.62,78.45 225 top
S13  [SWITCH_DPDT_SMD_AYZ0202]  147.18,88.68 135 top
S14  !RESET  [TACTILE_SWITCH_SMD_5.2MM]  122.93,78.45 225 top
S15  [SWITCH_DPDT_SMD_AYZ0202]  198.48,88.68 135 top
S16  !RESET  [TACTILE_SWITCH_SMD_5.2MM]  174.24,78.45 225 top
TP1  TEST-POINT3  [PAD.03X.03]  17.89,37.65 315 bottom
TP2  TEST-POINT3  [PAD.03X.03]  17.89,41.24 315 bottom
TP3  TEST-POINT3  [PAD.03X.03]  19.69,39.44 315 bottom
TP4  TEST-POINT3  [PAD.03X.03]  21.48,41.24 315 bottom
TP5  TEST-POINT3  [PAD.03X.03]  19.69,43.03 315 bottom
TP6  TEST-POINT3  [PAD.03X.03]  16.09,39.44 315 bottom
TP7  TEST-POINT3  [PAD.03X.03]  47.61,32.17 315 bottom
TP8  TEST-POINT3  [PAD.03X.03]  45.28,38.1 315 bottom
TP9  TEST-POINT3  [PAD.03X.03]  69.2,37.65 315 bottom
TP10  TEST-POINT3  [PAD.03X.03]  69.2,41.24 315 bottom
TP11  TEST-POINT3  [PAD.03X.03]  70.99,39.44 315 bottom
TP12  TEST-POINT3  [PAD.03X.03]  72.79,41.24 315 bottom
TP13  TEST-POINT3  [PAD.03X.03]  70.99,43.03 315 bottom
TP14  TEST-POINT3  [PAD.03X.03]  67.4,39.44 315 bottom
TP15  TEST-POINT3  [PAD.03X.03]  98.92,32.17 315 bottom
TP16  TEST-POINT3  [PAD.03X.03]  96.59,38.1 315 bottom
TP17  TEST-POINT3  [PAD.03X.03]  120.51,37.65 315 bottom
TP18  TEST-POINT3  [PAD.03X.03]  120.51,41.24 315 bottom
TP19  TEST-POINT3  [PAD.03X.03]  122.3,39.44 315 bottom
TP20  TEST-POINT3  [PAD.03X.03]  124.1,41.24 315 bottom
TP21  TEST-POINT3  [PAD.03X.03]  122.3,43.03 315 bottom
TP22  TEST-POINT3  [PAD.03X.03]  118.71,39.44 315 bottom
TP23  TEST-POINT3  [PAD.03X.03]  150.22,32.17 315 bottom
TP24  TEST-POINT3  [PAD.03X.03]  147.9,38.1 315 bottom
TP25  TEST-POINT3  [PAD.03X.03]  171.81,37.65 315 bottom
TP26  TEST-POINT3  [PAD.03X.03]  171.81,41.24 315 bottom
TP27  TEST-POINT3  [PAD.03X.03]  173.61,39.44 315 bottom
TP28  TEST-POINT3  [PAD.03X.03]  175.41,41.24 315 bottom
TP29  TEST-POINT3  [PAD.03X.03]  173.61,43.03 315 bottom
TP30  TEST-POINT3  [PAD.03X.03]  170.02,39.44 315 bottom
TP31  TEST-POINT3  [PAD.03X.03]  201.53,32.17 315 bottom
TP32  TEST-POINT3  [PAD.03X.03]  199.2,38.1 315 bottom
TP33  TEST-POINT3  [PAD.03X.03]  17.89,88.95 315 bottom
TP34  TEST-POINT3  [PAD.03X.03]  17.89,92.55 315 bottom
TP35  TEST-POINT3  [PAD.03X.03]  19.69,90.75 315 bottom
TP36  TEST-POINT3  [PAD.03X.03]  21.48,92.55 315 bottom
TP37  TEST-POINT3  [PAD.03X.03]  19.69,94.34 315 bottom
TP38  TEST-POINT3  [PAD.03X.03]  16.09,90.75 315 bottom
TP39  TEST-POINT3  [PAD.03X.03]  47.61,83.48 315 bottom
TP40  TEST-POINT3  [PAD.03X.03]  45.28,89.4 315 bottom
TP41  TEST-POINT3  [PAD.03X.03]  69.2,88.95 315 bottom
TP42  TEST-POINT3  [PAD.03X.03]  69.2,92.55 315 bottom
TP43  TEST-POINT3  [PAD.03X.03]  70.99,90.75 315 bottom
TP44  TEST-POINT3  [PAD.03X.03]  72.79,92.55 315 bottom
TP45  TEST-POINT3  [PAD.03X.03]  70.99,94.34 315 bottom
TP46  TEST-POINT3  [PAD.03X.03]  67.4,90.75 315 bottom
TP47  TEST-POINT3  [PAD.03X.03]  98.92,83.48 315 bottom
TP48  TEST-POINT3  [PAD.03X.03]  96.59,89.4 315 bottom
TP49  TEST-POINT3  [PAD.03X.03]  120.51,88.95 315 bottom
TP50  TEST-POINT3  [PAD.03X.03]  120.51,92.55 315 bottom
TP51  TEST-POINT3  [PAD.03X.03]  122.3,90.75 315 bottom
TP52  TEST-POINT3  [PAD.03X.03]  124.1,92.55 315 bottom
TP53  TEST-POINT3  [PAD.03X.03]  122.3,94.34 315 bottom
TP54  TEST-POINT3  [PAD.03X.03]  118.71,90.75 315 bottom
TP55  TEST-POINT3  [PAD.03X.03]  150.22,83.48 315 bottom
TP56  TEST-POINT3  [PAD.03X.03]  147.9,89.4 315 bottom
TP57  TEST-POINT3  [PAD.03X.03]  171.81,88.95 315 bottom
TP58  TEST-POINT3  [PAD.03X.03]  171.81,92.55 315 bottom
TP59  TEST-POINT3  [PAD.03X.03]  173.61,90.75 315 bottom
TP60  TEST-POINT3  [PAD.03X.03]  175.41,92.55 315 bottom
TP61  TEST-POINT3  [PAD.03X.03]  173.61,94.34 315 bottom
TP62  TEST-POINT3  [PAD.03X.03]  170.02,90.75 315 bottom
TP63  TEST-POINT3  [PAD.03X.03]  201.53,83.48 315 bottom
TP64  TEST-POINT3  [PAD.03X.03]  199.2,89.4 315 bottom
U1  MCP73831  [SOT23-5]  45.73,29.56 135 top
U2  3.3V  [SOT23-5]  42.05,43.12 315 top
U3  MCP73831  [SOT23-5]  97.04,29.56 135 top
U4  32U4  [QFN-44-PAD_1:1-LESS_PASTE]  80.87,42.14 45 top
U5  32U4  [QFN-44-PAD_1:1-LESS_PASTE]  29.56,42.14 45 top
U6  3.3V  [SOT23-5]  93.35,43.12 315 top
U7  MCP73831  [SOT23-5]  148.34,29.56 135 top
U8  32U4  [QFN-44-PAD_1:1-LESS_PASTE]  132.18,42.14 45 top
U9  3.3V  [SOT23-5]  144.66,43.12 315 top
U10  MCP73831  [SOT23-5]  199.65,29.56 135 top
U11  32U4  [QFN-44-PAD_1:1-LESS_PASTE]  183.49,42.14 45 top
U12  3.3V  [SOT23-5]  195.97,43.12 315 top
U13  MCP73831  [SOT23-5]  45.73,80.87 135 top
U14  32U4  [QFN-44-PAD_1:1-LESS_PASTE]  29.56,93.44 45 top
U15  3.3V  [SOT23-5]  42.05,94.43 315 top
U16  MCP73831  [SOT23-5]  97.04,80.87 135 top
U17  32U4  [QFN-44-PAD_1:1-LESS_PASTE]  80.87,93.44 45 top
U18  3.3V  [SOT23-5]  93.35,94.43 315 top
U19  MCP73831  [SOT23-5]  148.34,80.87 135 top
U20  32U4  [QFN-44-PAD_1:1-LESS_PASTE]  132.18,93.44 45 top
U21  3.3V  [SOT23-5]  144.66,94.43 315 top
U22  MCP73831  [SOT23-5]  199.65,80.87 135 top
U23  32U4  [QFN-44-PAD_1:1-LESS_PASTE]  183.49,93.44 45 top
U24  3.3V  [SOT23-5]  195.97,94.43 315 top
U$1  LILYLOGO_SHORT  [LILYPAD-WEARABLES_LOGO-LILYPAD]  30.71,33.8 315 bottom
U$2  [PETAL_PAD_OFF]  63.03,40.14 339 top
U$3  [PETAL_PAD_OFF]  11.72,40.14 339 top
U$4  [PETAL_SPACE_OFF]  63.03,40.14 339 top
U$5  [PETAL_SPACE_OFF]  104.82,37.95 195 top
U$6  [PETAL_PAD_OFF]  104.82,37.95 195 top
U$7  [PETAL_SPACE_OFF]  11.72,40.14 339 top
U$8  [PETAL_SPACE_OFF]  53.51,37.95 195 top
U$9  [PETAL_PAD_OFF]  53.51,37.95 195 top
U$10  [PETAL_SPACE_OFF]  42.24,51.86 243 top
U$11  [PETAL_PAD_OFF]  42.24,51.86 243 top
U$12  [PETAL_SPACE_OFF]  49.35,46.1 219 top
U$13  LILYLOGO_SHORT  [LILYPAD-WEARABLES_LOGO-LILYPAD]  19.43,38.27 45 top
U$14  [PETAL_SPACE_OFF]  93.55,51.86 243 top
U$15  [PETAL_PAD_OFF]  49.35,46.1 219 top
U$16  [PETAL_SPACE_OFF]  33.41,54.23 267 top
U$17  [PETAL_PAD_OFF]  33.41,54.23 267 top
U$18  [PETAL_SPACE_OFF]  44.24,13.81 123 top
U$19  [PETAL_PAD_OFF]  35.7,10.53 99 top
U$20  [PETAL_SPACE_OFF]  35.7,10.53 99 top
U$21  [PETAL_PAD_OFF]  44.24,13.81 123 top
U$22  [PETAL_SPACE_OFF]  50.71,20.28 147 top
U$23  [PETAL_PAD_OFF]  50.71,20.28 147 top
U$24  [PETAL_SPACE_OFF]  53.99,28.82 171 top
U$25  [PETAL_PAD_OFF]  53.99,28.82 171 top
U$26  [PETAL_SPACE_OFF]  10.29,31.11 3 top
U$27  [PETAL_PAD_OFF]  10.29,31.11 3 top
U$28  [PETAL_SPACE_OFF]  12.66,22.27 27 top
U$29  [PETAL_PAD_OFF]  12.66,22.27 27 top
U$30  [PETAL_SPACE_OFF]  18.41,15.16 51 top
U$31  [PETAL_PAD_OFF]  18.41,15.16 51 top
U$32  [PETAL_SPACE_OFF]  26.56,11.01 75 top
U$33  [PETAL_PAD_OFF]  26.56,11.01 75 top
U$34  [PETAL_PAD_OFF]  24.37,52.8 291 top
U$35  [PETAL_PAD_OFF]  93.55,51.86 243 top
U$36  [PETAL_SPACE_OFF]  100.66,46.1 219 top
U$37  [PETAL_PAD_OFF]  100.66,46.1 219 top
U$38  [PETAL_SPACE_OFF]  84.72,54.23 267 top
U$39  [PETAL_PAD_OFF]  84.72,54.23 267 top
U$40  [PETAL_SPACE_OFF]  95.55,13.81 123 top
U$41  [PETAL_PAD_OFF]  87.01,10.53 99 top
U$42  [PETAL_SPACE_OFF]  87.01,10.53 99 top
U$43  [PETAL_PAD_OFF]  95.55,13.81 123 top
U$44  [PETAL_SPACE_OFF]  102.02,20.28 147 top
U$45  [PETAL_PAD_OFF]  102.02,20.28 147 top
U$46  [PETAL_SPACE_OFF]  105.29,28.82 171 top
U$47  [PETAL_PAD_OFF]  105.29,28.82 171 top
U$48  [PETAL_SPACE_OFF]  61.59,31.11 3 top
U$49  [PETAL_PAD_OFF]  61.59,31.11 3 top
U$50  [PETAL_SPACE_OFF]  63.96,22.27 27 top
U$51  [PETAL_PAD_OFF]  63.96,22.27 27 top
U$52  [PETAL_SPACE_OFF]  69.72,15.16 51 top
U$53  [PETAL_PAD_OFF]  69.72,15.16 51 top
U$54  [PETAL_SPACE_OFF]  77.87,11.01 75 top
U$55  [PETAL_PAD_OFF]  77.87,11.01 75 top
U$56  [PETAL_PAD_OFF]  75.68,52.8 291 top
U$57  LILYLOGO_SHORT  [LILYPAD-WEARABLES_LOGO-LILYPAD]  70.74,38.27 45 top
U$58  LILYLOGO_SHORT  [LILYPAD-WEARABLES_LOGO-LILYPAD]  82.02,33.8 315 bottom
U$59  [PETAL_PAD_OFF]  114.33,40.14 339 top
U$60  [PETAL_SPACE_OFF]  114.33,40.14 339 top
U$61  [PETAL_SPACE_OFF]  156.12,37.95 195 top
U$62  [PETAL_PAD_OFF]  156.12,37.95 195 top
U$63  [PETAL_SPACE_OFF]  144.86,51.86 243 top
U$64  [PETAL_PAD_OFF]  144.86,51.86 243 top
U$65  [PETAL_SPACE_OFF]  151.97,46.1 219 top
U$66  [PETAL_PAD_OFF]  151.97,46.1 219 top
U$67  [PETAL_SPACE_OFF]  136.03,54.23 267 top
U$68  [PETAL_PAD_OFF]  136.03,54.23 267 top
U$69  [PETAL_SPACE_OFF]  146.86,13.81 123 top
U$70  [PETAL_PAD_OFF]  138.32,10.53 99 top
U$71  [PETAL_SPACE_OFF]  138.32,10.53 99 top
U$72  [PETAL_PAD_OFF]  146.86,13.81 123 top
U$73  [PETAL_SPACE_OFF]  153.32,20.28 147 top
U$74  [PETAL_PAD_OFF]  153.32,20.28 147 top
U$75  [PETAL_SPACE_OFF]  156.6,28.82 171 top
U$76  [PETAL_PAD_OFF]  156.6,28.82 171 top
U$77  [PETAL_SPACE_OFF]  112.9,31.11 3 top
U$78  [PETAL_PAD_OFF]  112.9,31.11 3 top
U$79  [PETAL_SPACE_OFF]  115.27,22.27 27 top
U$80  [PETAL_PAD_OFF]  115.27,22.27 27 top
U$81  [PETAL_SPACE_OFF]  121.03,15.16 51 top
U$82  [PETAL_PAD_OFF]  121.03,15.16 51 top
U$83  [PETAL_SPACE_OFF]  129.18,11.01 75 top
U$84  [PETAL_PAD_OFF]  129.18,11.01 75 top
U$85  [PETAL_PAD_OFF]  126.99,52.8 291 top
U$86  LILYLOGO_SHORT  [LILYPAD-WEARABLES_LOGO-LILYPAD]  122.05,38.27 45 top
U$87  LILYLOGO_SHORT  [LILYPAD-WEARABLES_LOGO-LILYPAD]  133.33,33.8 315 bottom
U$88  [PETAL_PAD_OFF]  165.64,40.14 339 top
U$89  [PETAL_SPACE_OFF]  165.64,40.14 339 top
U$90  [PETAL_SPACE_OFF]  207.43,37.95 195 top
U$91  [PETAL_PAD_OFF]  207.43,37.95 195 top
U$92  [PETAL_SPACE_OFF]  196.17,51.86 243 top
U$93  [PETAL_PAD_OFF]  196.17,51.86 243 top
U$94  [PETAL_SPACE_OFF]  203.28,46.1 219 top
U$95  [PETAL_PAD_OFF]  203.28,46.1 219 top
U$96  [PETAL_SPACE_OFF]  187.33,54.23 267 top
U$97  [PETAL_PAD_OFF]  187.33,54.23 267 top
U$98  [PETAL_SPACE_OFF]  198.16,13.81 123 top
U$99  [PETAL_PAD_OFF]  189.62,10.53 99 top
U$100  [PETAL_SPACE_OFF]  189.62,10.53 99 top
U$101  [PETAL_PAD_OFF]  198.16,13.81 123 top
U$102  [PETAL_SPACE_OFF]  204.63,20.28 147 top
U$103  [PETAL_PAD_OFF]  204.63,20.28 147 top
U$104  [PETAL_SPACE_OFF]  207.91,28.82 171 top
U$105  [PETAL_PAD_OFF]  207.91,28.82 171 top
U$106  [PETAL_SPACE_OFF]  164.21,31.11 3 top
U$107  [PETAL_PAD_OFF]  164.21,31.11 3 top
U$108  [PETAL_SPACE_OFF]  166.58,22.27 27 top
U$109  [PETAL_PAD_OFF]  166.58,22.27 27 top
U$110  [PETAL_SPACE_OFF]  172.34,15.16 51 top
U$111  [PETAL_PAD_OFF]  172.34,15.16 51 top
U$112  [PETAL_SPACE_OFF]  180.49,11.01 75 top
U$113  [PETAL_PAD_OFF]  180.49,11.01 75 top
U$114  [PETAL_PAD_OFF]  178.3,52.8 291 top
U$115  LILYLOGO_SHORT  [LILYPAD-WEARABLES_LOGO-LILYPAD]  173.36,38.27 45 top
U$116  LILYLOGO_SHORT  [LILYPAD-WEARABLES_LOGO-LILYPAD]  184.64,33.8 315 bottom
U$117  [PETAL_PAD_OFF]  11.72,91.45 339 top
U$118  [PETAL_SPACE_OFF]  11.72,91.45 339 top
U$119  [PETAL_SPACE_OFF]  53.51,89.26 195 top
U$120  [PETAL_PAD_OFF]  53.51,89.26 195 top
U$121  [PETAL_SPACE_OFF]  42.24,103.17 243 top
U$122  [PETAL_PAD_OFF]  42.24,103.17 243 top
U$123  [PETAL_SPACE_OFF]  49.35,97.41 219 top
U$124  [PETAL_PAD_OFF]  49.35,97.41 219 top
U$125  [PETAL_SPACE_OFF]  33.41,105.54 267 top
U$126  [PETAL_PAD_OFF]  33.41,105.54 267 top
U$127  [PETAL_SPACE_OFF]  44.24,65.12 123 top
U$128  [PETAL_PAD_OFF]  35.7,61.84 99 top
U$129  [PETAL_SPACE_OFF]  35.7,61.84 99 top
U$130  [PETAL_PAD_OFF]  44.24,65.12 123 top
U$131  [PETAL_SPACE_OFF]  50.71,71.58 147 top
U$132  [PETAL_PAD_OFF]  50.71,71.58 147 top
U$133  [PETAL_SPACE_OFF]  53.99,80.12 171 top
U$134  [PETAL_PAD_OFF]  53.99,80.12 171 top
U$135  [PETAL_SPACE_OFF]  10.29,82.41 3 top
U$136  [PETAL_PAD_OFF]  10.29,82.41 3 top
U$137  [PETAL_SPACE_OFF]  12.66,73.58 27 top
U$138  [PETAL_PAD_OFF]  12.66,73.58 27 top
U$139  [PETAL_SPACE_OFF]  18.41,66.47 51 top
U$140  [PETAL_PAD_OFF]  18.41,66.47 51 top
U$141  [PETAL_SPACE_OFF]  26.56,62.32 75 top
U$142  [PETAL_PAD_OFF]  26.56,62.32 75 top
U$143  [PETAL_PAD_OFF]  24.37,104.11 291 top
U$144  LILYLOGO_SHORT  [LILYPAD-WEARABLES_LOGO-LILYPAD]  19.43,89.57 45 top
U$145  LILYLOGO_SHORT  [LILYPAD-WEARABLES_LOGO-LILYPAD]  30.71,85.11 315 bottom
U$146  [PETAL_PAD_OFF]  63.03,91.45 339 top
U$147  [PETAL_SPACE_OFF]  63.03,91.45 339 top
U$148  [PETAL_SPACE_OFF]  104.82,89.26 195 top
U$149  [PETAL_PAD_OFF]  104.82,89.26 195 top
U$150  [PETAL_SPACE_OFF]  93.55,103.17 243 top
U$151  [PETAL_PAD_OFF]  93.55,103.17 243 top
U$152  [PETAL_SPACE_OFF]  100.66,97.41 219 top
U$153  [PETAL_PAD_OFF]  100.66,97.41 219 top
U$154  [PETAL_SPACE_OFF]  84.72,105.54 267 top
U$155  [PETAL_PAD_OFF]  84.72,105.54 267 top
U$156  [PETAL_SPACE_OFF]  95.55,65.12 123 top
U$157  [PETAL_PAD_OFF]  87.01,61.84 99 top
U$158  [PETAL_SPACE_OFF]  87.01,61.84 99 top
U$159  [PETAL_PAD_OFF]  95.55,65.12 123 top
U$160  [PETAL_SPACE_OFF]  102.02,71.58 147 top
U$161  [PETAL_PAD_OFF]  102.02,71.58 147 top
U$162  [PETAL_SPACE_OFF]  105.29,80.12 171 top
U$163  [PETAL_PAD_OFF]  105.29,80.12 171 top
U$164  [PETAL_SPACE_OFF]  61.59,82.41 3 top
U$165  [PETAL_PAD_OFF]  61.59,82.41 3 top
U$166  [PETAL_SPACE_OFF]  63.96,73.58 27 top
U$167  [PETAL_PAD_OFF]  63.96,73.58 27 top
U$168  [PETAL_SPACE_OFF]  69.72,66.47 51 top
U$169  [PETAL_PAD_OFF]  69.72,66.47 51 top
U$170  [PETAL_SPACE_OFF]  77.87,62.32 75 top
U$171  [PETAL_PAD_OFF]  77.87,62.32 75 top
U$172  [PETAL_PAD_OFF]  75.68,104.11 291 top
U$173  LILYLOGO_SHORT  [LILYPAD-WEARABLES_LOGO-LILYPAD]  70.74,89.57 45 top
U$174  LILYLOGO_SHORT  [LILYPAD-WEARABLES_LOGO-LILYPAD]  82.02,85.11 315 bottom
U$175  [PETAL_PAD_OFF]  114.33,91.45 339 top
U$176  [PETAL_SPACE_OFF]  114.33,91.45 339 top
U$177  [PETAL_SPACE_OFF]  156.12,89.26 195 top
U$178  [PETAL_PAD_OFF]  156.12,89.26 195 top
U$179  [PETAL_SPACE_OFF]  144.86,103.17 243 top
U$180  [PETAL_PAD_OFF]  144.86,103.17 243 top
U$181  [PETAL_SPACE_OFF]  151.97,97.41 219 top
U$182  [PETAL_PAD_OFF]  151.97,97.41 219 top
U$183  [PETAL_SPACE_OFF]  136.03,105.54 267 top
U$184  [PETAL_PAD_OFF]  136.03,105.54 267 top
U$185  [PETAL_SPACE_OFF]  146.86,65.12 123 top
U$186  [PETAL_PAD_OFF]  138.32,61.84 99 top
U$187  [PETAL_SPACE_OFF]  138.32,61.84 99 top
U$188  [PETAL_PAD_OFF]  146.86,65.12 123 top
U$189  [PETAL_SPACE_OFF]  153.32,71.58 147 top
U$190  [PETAL_PAD_OFF]  153.32,71.58 147 top
U$191  [PETAL_SPACE_OFF]  156.6,80.12 171 top
U$192  [PETAL_PAD_OFF]  156.6,80.12 171 top
U$193  [PETAL_SPACE_OFF]  112.9,82.41 3 top
U$194  [PETAL_PAD_OFF]  112.9,82.41 3 top
U$195  [PETAL_SPACE_OFF]  115.27,73.58 27 top
U$196  [PETAL_PAD_OFF]  115.27,73.58 27 top
U$197  [PETAL_SPACE_OFF]  121.03,66.47 51 top
U$198  [PETAL_PAD_OFF]  121.03,66.47 51 top
U$199  [PETAL_SPACE_OFF]  129.18,62.32 75 top
U$200  [PETAL_PAD_OFF]  129.18,62.32 75 top
U$201  [PETAL_PAD_OFF]  126.99,104.11 291 top
U$202  LILYLOGO_SHORT  [LILYPAD-WEARABLES_LOGO-LILYPAD]  122.05,89.57 45 top
U$203  LILYLOGO_SHORT  [LILYPAD-WEARABLES_LOGO-LILYPAD]  133.33,85.11 315 bottom
U$204  [PETAL_PAD_OFF]  165.64,91.45 339 top
U$205  [PETAL_SPACE_OFF]  165.64,91.45 339 top
U$206  [PETAL_SPACE_OFF]  207.43,89.26 195 top
U$207  [PETAL_PAD_OFF]  207.43,89.26 195 top
U$208  [PETAL_SPACE_OFF]  196.17,103.17 243 top
U$209  [PETAL_PAD_OFF]  196.17,103.17 243 top
U$210  [PETAL_SPACE_OFF]  203.28,97.41 219 top
U$211  [PETAL_PAD_OFF]  203.28,97.41 219 top
U$212  [PETAL_SPACE_OFF]  187.33,105.54 267 top
U$213  [PETAL_PAD_OFF]  187.33,105.54 267 top
U$214  [PETAL_SPACE_OFF]  198.16,65.12 123 top
U$215  [PETAL_PAD_OFF]  189.62,61.84 99 top
U$216  [PETAL_SPACE_OFF]  189.62,61.84 99 top
U$217  [PETAL_PAD_OFF]  198.16,65.12 123 top
U$218  [PETAL_SPACE_OFF]  204.63,71.58 147 top
U$219  [PETAL_PAD_OFF]  204.63,71.58 147 top
U$220  [PETAL_SPACE_OFF]  207.91,80.12 171 top
U$221  [PETAL_PAD_OFF]  207.91,80.12 171 top
U$222  [PETAL_SPACE_OFF]  164.21,82.41 3 top
U$223  [PETAL_PAD_OFF]  164.21,82.41 3 top
U$224  [PETAL_SPACE_OFF]  166.58,73.58 27 top
U$225  [PETAL_PAD_OFF]  166.58,73.58 27 top
U$226  [PETAL_SPACE_OFF]  172.34,66.47 51 top
U$227  [PETAL_PAD_OFF]  172.34,66.47 51 top
U$228  [PETAL_SPACE_OFF]  180.49,62.32 75 top
U$229  [PETAL_PAD_OFF]  180.49,62.32 75 top
U$230  [PETAL_PAD_OFF]  178.3,104.11 291 top
U$231  LILYLOGO_SHORT  [LILYPAD-WEARABLES_LOGO-LILYPAD]  173.36,89.57 45 top
U$232  LILYLOGO_SHORT  [LILYPAD-WEARABLES_LOGO-LILYPAD]  184.64,85.11 315 bottom
Y1  8MHz  [RESONATOR-SMD]  35.4,36.84 225 top
Y2  8MHz  [RESONATOR-SMD]  86.71,36.84 225 top
Y3  8MHz  [RESONATOR-SMD]  138.02,36.84 225 top
Y4  8MHz  [RESONATOR-SMD]  189.33,36.84 225 top
Y5  8MHz  [RESONATOR-SMD]  35.4,88.15 225 top
Y6  8MHz  [RESONATOR-SMD]  86.71,88.15 225 top
Y7  8MHz  [RESONATOR-SMD]  138.02,88.15 225 top
Y8  8MHz  [RESONATOR-SMD]  189.33,88.15 225 top

## Library data of the parts
C1-C4 C9 C10 C15-C17 C22-C24 C29-C31 C36-C38 C43-C45 C50-C52 = SparkFun-Capacitors; PROD_ID: CAP-12416
C5 C11 C18 C25 C32 C39 C46 C53 = SparkFun-Capacitors; PROD_ID: CAP-12417
C6-C8 C12-C14 C19-C21 C26-C28 C33-C35 C40-C42 C47-C49 C54-C56 = SparkFun-Capacitors; PROD_ID: CAP-08280
D1 D2 D4 D6 D8 D11 D13 D15 = SparkFun-DiscreteSemi; PROD_ID: DIO-09886
D3 D5 D7 D9 D10 D12 D14 D16 = SparkFun-LED; PROD_ID: DIO-13722
E$1 = SparkFun-Retired
E$5 E$8 LOGO1-LOGO16 = SparkFun-Aesthetics
J1-J14 J17-J30 J33-J46 J49-J62 J65-J78 J81-J94 J97-J110 J113-J126 = LilyPad-Wearables
J15 J31 J47 J63 J79 J95 J111 J127 = SparkFun-Connectors; PROD_ID: CONN-13711
J16 J32 J48 J64 J80 J96 J112 J128 = SparkFun-Connectors; PROD_ID: CONN-11443; SF_ID: PRT-08612
JP1-JP32 = SparkFun
LED1 LED10 LED19 LED28 LED37 LED46 LED55 LED64 = SparkFun-LED; PROD_ID: DIO-00819
LED2 LED11 LED20 LED29 LED38 LED47 LED56 LED65 = SparkFun-LED; PROD_ID: DIO-09003
LED3 LED12 LED21 LED30 LED39 LED48 LED57 LED66 = SparkFun-LED; PROD_ID: DIO-00821
LED4-LED9 LED13-LED18 LED22-LED27 LED31-LED36 LED40-LED45 LED49-LED54 LED58-LED63 LED67-LED72 = SparkFun-LED; PROD_ID: DIO-09004
R1 R7 R14 R17 R23 R30 R33 R39 R46 R49 R55 R62 R65 R71 R78 R81 R87 R94 R97 R103 R110 R113 R119 R126 = SparkFun-Resistors; PROD_ID: RES-00818
R2 R3 R18 R19 R34 R35 R50 R51 R66 R67 R82 R83 R98 R99 R114 R115 = SparkFun-Resistors; PROD_ID: RES-00824
R4 R5 R15 R16 R20 R21 R31 R32 R36 R37 R47 R48 R52 R53 R63 R64 R68 R69 R79 R80 R84 R85 R95 R96 R100 R101 R111 R112 R116 R117 R127 R128 = SparkFun-Resistors; PROD_ID: RES-12427
R6 R22 R38 R54 R70 R86 R102 R118 = SparkFun-Resistors; PROD_ID: RES-08272
R8-R13 R24-R29 R40-R45 R56-R61 R72-R77 R88-R93 R104-R109 R120-R125 = SparkFun-Resistors; PROD_ID: RES-13829
S1 S3 S5 S7 S9 S11 S13 S15 = SparkFun-Switches; PROD_ID: SWCH-08179; SF_SKU: COM-00597
S2 S4 S6 S8 S10 S12 S14 S16 = SparkFun-Switches; PROD_ID: SWCH-08247; SF_SKU: COM-08720
TP1-TP64 = SparkFun-Connectors
U1 U3 U7 U10 U13 U16 U19 U22 = SparkFun-PowerIC; PROD_ID: IC-09995
U2 U6 U9 U12 U15 U18 U21 U24 = SparkFun-IC-Power; PROD_ID: VREG-12457
U4 U5 U8 U11 U14 U17 U20 U23 = SparkFun-IC-Microcontroller; PROD_ID: IC-10828
U$1-U$232 = newLilypadParts
Y1-Y8 = SparkFun-FreqCtrl; PROD_ID: XTAL-08895